# EAGLE board BradLightFlash.rev2-panou (EAGLE 6.5.0), part 1 of 2
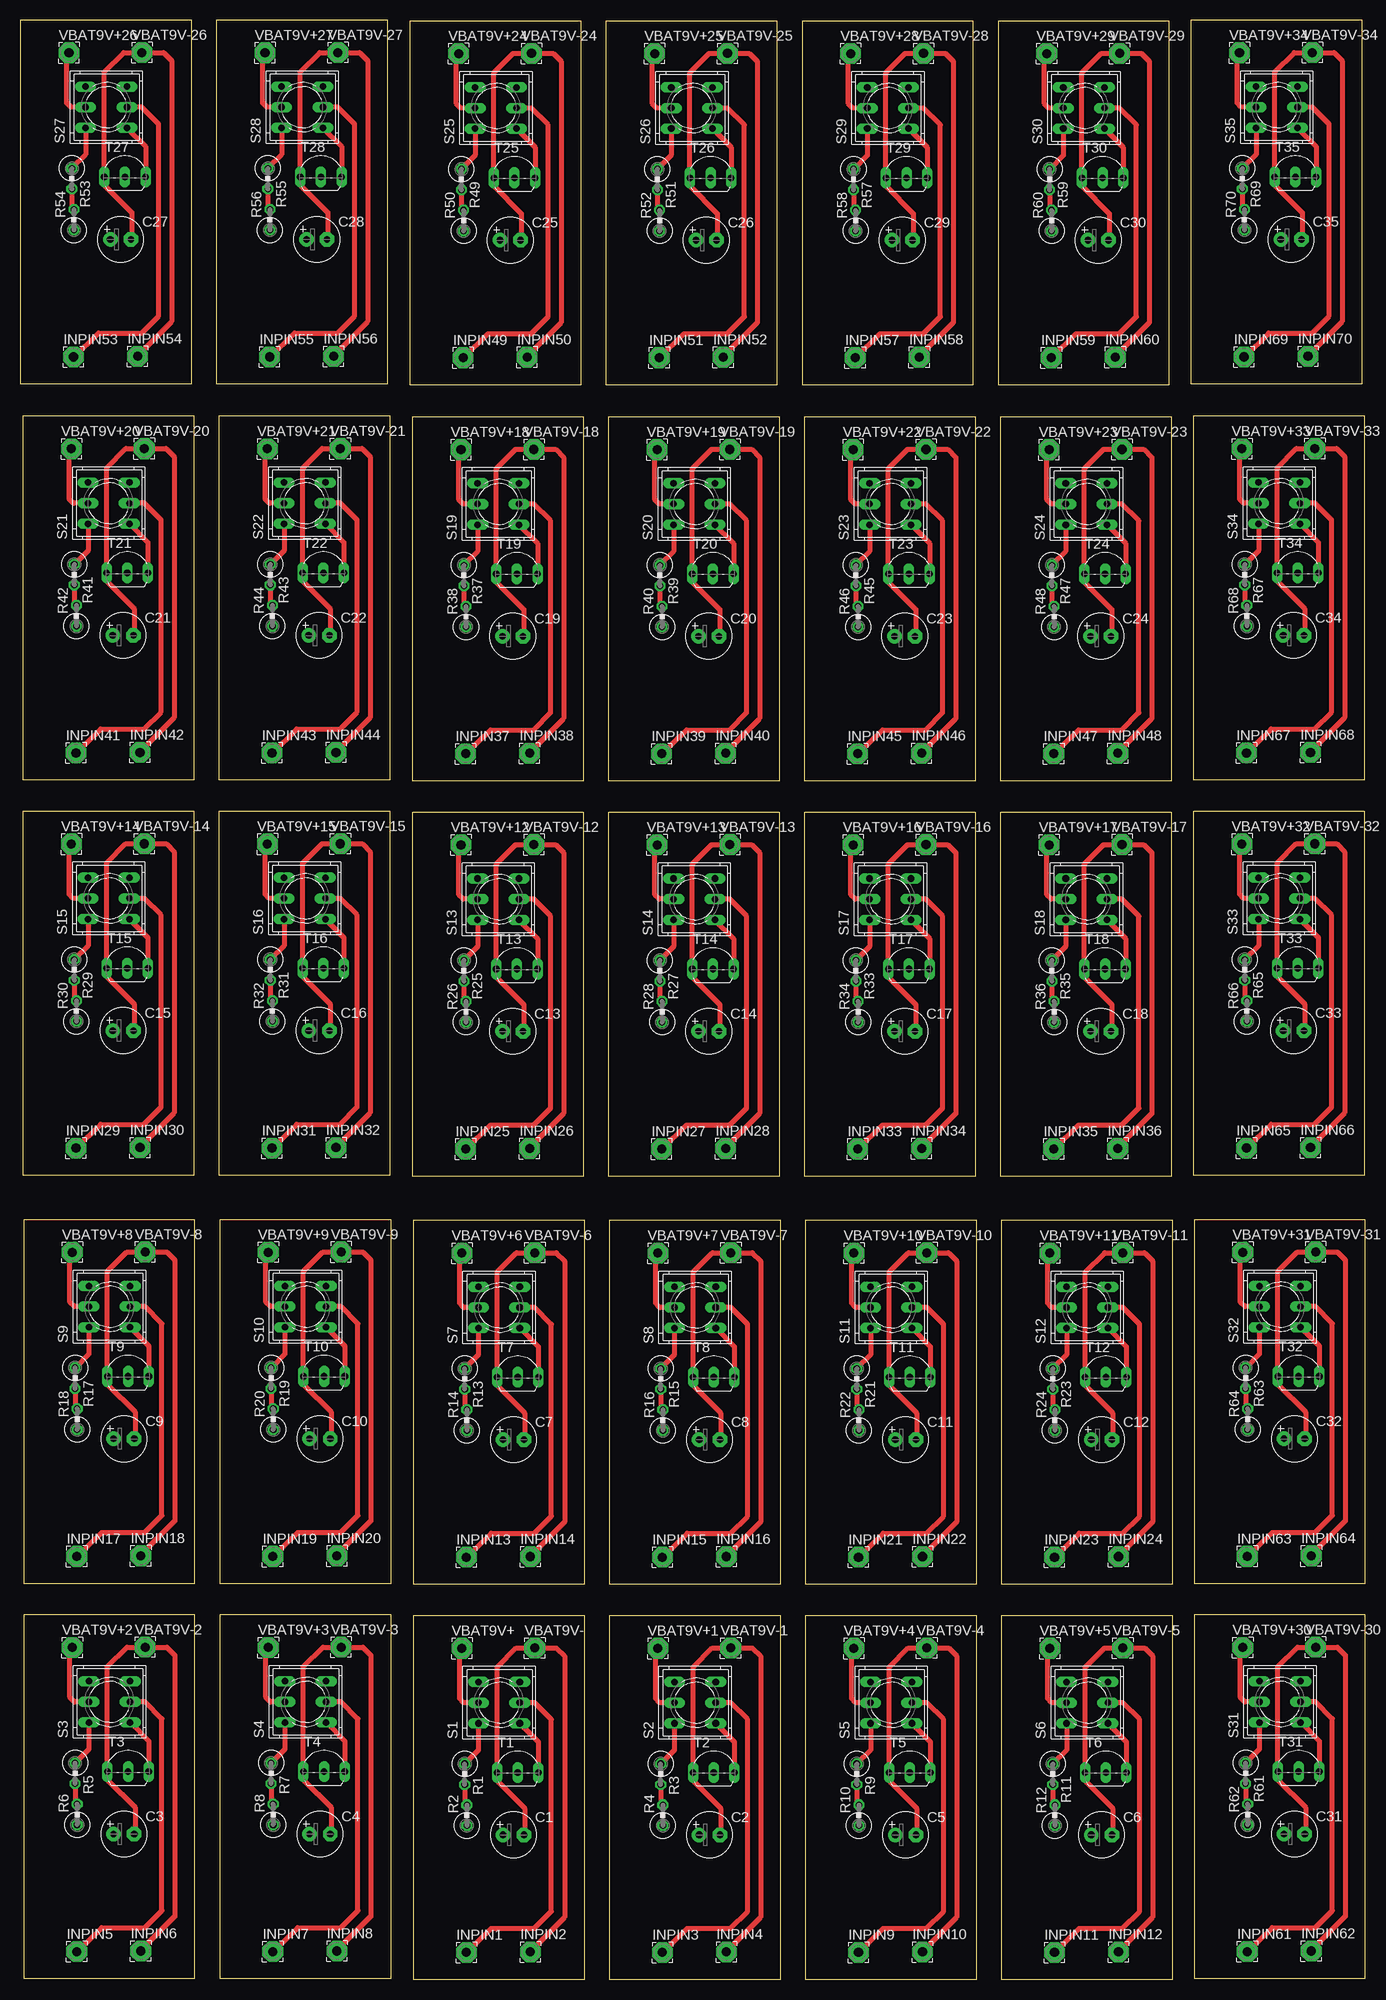
[diagram p0: board, top side]
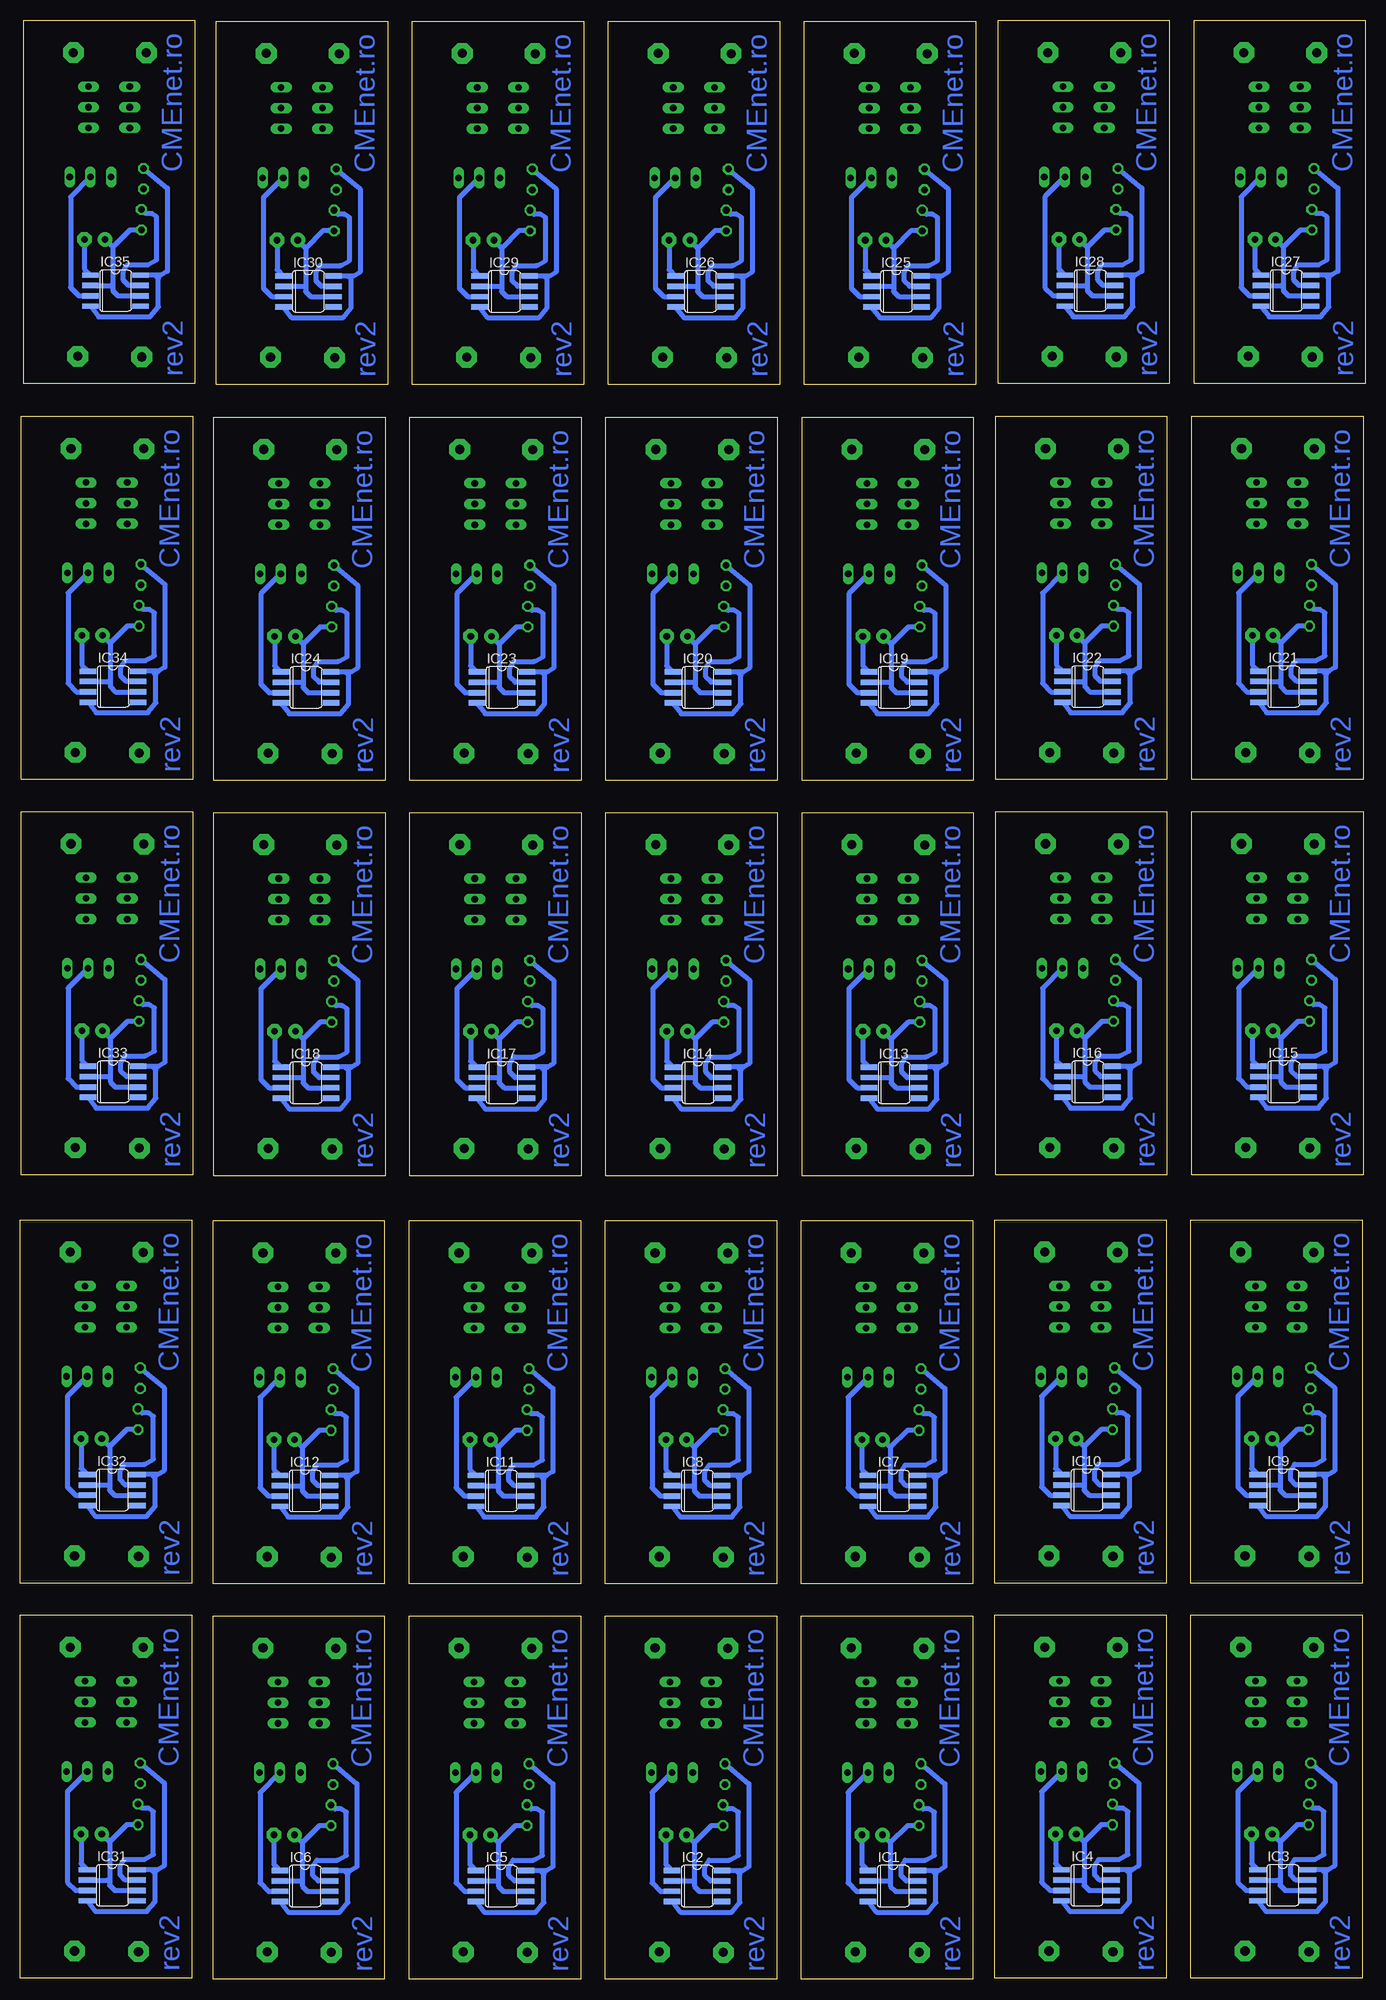
[diagram p1: board, bottom side, seen from below]

Size 165.37 x 240.88 mm. Coordinates in mm from the lower left corner, seen from the top.
Outline: 48.3,0 69.37,0 69.37,44.68 48.3,44.68 48.3,0
Outline: 72.4,0 93.47,0 93.47,44.68 72.4,44.68 72.4,0
Outline: 0.4,0.1 21.47,0.1 21.47,44.78 0.4,44.78 0.4,0.1
Outline: 24.5,0.1 45.57,0.1 45.57,44.78 24.5,44.78 24.5,0.1
Outline: 96.5,0 117.57,0 117.57,44.68 96.5,44.68 96.5,0
Outline: 120.6,0 141.67,0 141.67,44.68 120.6,44.68 120.6,0
Outline: 48.3,48.6 69.37,48.6 69.37,93.28 48.3,93.28 48.3,48.6
Outline: 72.4,48.6 93.47,48.6 93.47,93.28 72.4,93.28 72.4,48.6
Outline: 0.4,48.7 21.47,48.7 21.47,93.38 0.4,93.38 0.4,48.7
Outline: 24.5,48.7 45.57,48.7 45.57,93.38 24.5,93.38 24.5,48.7
Outline: 96.5,48.6 117.57,48.6 117.57,93.28 96.5,93.28 96.5,48.6
Outline: 120.6,48.6 141.67,48.6 141.67,93.28 120.6,93.28 120.6,48.6
Outline: 48.2,98.8 69.27,98.8 69.27,143.48 48.2,143.48 48.2,98.8
Outline: 72.3,98.8 93.37,98.8 93.37,143.48 72.3,143.48 72.3,98.8
Outline: 0.3,98.9 21.37,98.9 21.37,143.58 0.3,143.58 0.3,98.9
Outline: 24.4,98.9 45.47,98.9 45.47,143.58 24.4,143.58 24.4,98.9
Outline: 96.4,98.8 117.47,98.8 117.47,143.48 96.4,143.48 96.4,98.8
Outline: 120.5,98.8 141.57,98.8 141.57,143.48 120.5,143.48 120.5,98.8
Outline: 48.2,147.4 69.27,147.4 69.27,192.08 48.2,192.08 48.2,147.4
Outline: 72.3,147.4 93.37,147.4 93.37,192.08 72.3,192.08 72.3,147.4
Outline: 0.3,147.5 21.37,147.5 21.37,192.18 0.3,192.18 0.3,147.5
Outline: 24.4,147.5 45.47,147.5 45.47,192.18 24.4,192.18 24.4,147.5
Outline: 96.4,147.4 117.47,147.4 117.47,192.08 96.4,192.08 96.4,147.4
Outline: 120.5,147.4 141.57,147.4 141.57,192.08 120.5,192.08 120.5,147.4
Outline: 47.9,196.1 68.97,196.1 68.97,240.78 47.9,240.78 47.9,196.1
Outline: 72,196.1 93.07,196.1 93.07,240.78 72,240.78 72,196.1
Outline: 0,196.2 21.07,196.2 21.07,240.88 0,240.88 0,196.2
Outline: 24.1,196.2 45.17,196.2 45.17,240.88 24.1,240.88 24.1,196.2
Outline: 96.1,196.1 117.17,196.1 117.17,240.78 96.1,240.78 96.1,196.1
Outline: 120.2,196.1 141.27,196.1 141.27,240.78 120.2,240.78 120.2,196.1
Outline: 144.3,0.1 165.37,0.1 165.37,44.78 144.3,44.78 144.3,0.1
Outline: 144.3,48.7 165.37,48.7 165.37,93.38 144.3,93.38 144.3,48.7
Outline: 144.2,98.9 165.27,98.9 165.27,143.58 144.2,143.58 144.2,98.9
Outline: 144.2,147.5 165.27,147.5 165.27,192.18 144.2,192.18 144.2,147.5
Outline: 143.9,196.2 164.97,196.2 164.97,240.88 143.9,240.88 143.9,196.2
Copper layers (1*16): Top 0.035mm / dielectric 1.5mm / Bottom 0.035mm
Design rules "default": minimum track width 10mil, minimum drill 24mil, track to track 8mil, track to pad 8mil, pad to pad 8mil, via to via 8mil, smd to smd 8mil, copper to edge 40mil, drill to drill 8mil, minimum pad ring 10mil, minimum via ring 8mil, stop-mask expansion 4mil, vias tented up to drill 0mil, thermal gap 10mil

## Footprints (pad centres in the part's own frame; a part is rotated, then mirrored left to right if it is on the bottom)
E2,5-6 = drill 0.813 pad 1.778: + -1.27,0 | drill 0.813 pad 1.778 octagon: - 1.27,0
SO08 = smd 0.66 x 2.032: 1 -1.905,-3.073; 2 -0.635,-3.073; 3 0.635,-3.073; 4 1.905,-3.073; 5 1.905,3.073; 6 0.635,3.073; 7 -0.635,3.073; 8 -1.905,3.073
2,54/1,1 = drill 1.118 pad 2.54 octagon: 1 0,0
0309V = drill 0.813 octagon: 1 -1.27,0; 2 1.27,0
9077-2 = drill 0.813 long: 1 -2.54,2.54; 2 0,2.54; 3 2.54,2.54; 4 -2.54,-2.54; 5 0,-2.54; 6 2.54,-2.54
TO92-EBC-OVAL = drill 0.813 long: B 0,-1.27; C 2.54,-1.27; E -2.54,-1.27

## Placement (x,y rotation side)
C1  470uF  [E2,5-6]  60.63,17.75 0 top
C2  470uF  [E2,5-6]  84.73,17.75 0 top
C3  470uF  [E2,5-6]  12.73,17.85 0 top
C4  470uF  [E2,5-6]  36.83,17.85 0 top
C5  470uF  [E2,5-6]  108.83,17.75 0 top
C6  470uF  [E2,5-6]  132.93,17.75 0 top
C7  470uF  [E2,5-6]  60.63,66.35 0 top
C8  470uF  [E2,5-6]  84.73,66.35 0 top
C9  470uF  [E2,5-6]  12.73,66.45 0 top
C10  470uF  [E2,5-6]  36.83,66.45 0 top
C11  470uF  [E2,5-6]  108.83,66.35 0 top
C12  470uF  [E2,5-6]  132.93,66.35 0 top
C13  470uF  [E2,5-6]  60.53,116.55 0 top
C14  470uF  [E2,5-6]  84.63,116.55 0 top
C15  470uF  [E2,5-6]  12.63,116.65 0 top
C16  470uF  [E2,5-6]  36.73,116.65 0 top
C17  470uF  [E2,5-6]  108.73,116.55 0 top
C18  470uF  [E2,5-6]  132.83,116.55 0 top
C19  470uF  [E2,5-6]  60.53,165.15 0 top
C20  470uF  [E2,5-6]  84.63,165.15 0 top
C21  470uF  [E2,5-6]  12.63,165.25 0 top
C22  470uF  [E2,5-6]  36.73,165.25 0 top
C23  470uF  [E2,5-6]  108.73,165.15 0 top
C24  470uF  [E2,5-6]  132.83,165.15 0 top
C25  470uF  [E2,5-6]  60.23,213.85 0 top
C26  470uF  [E2,5-6]  84.33,213.85 0 top
C27  470uF  [E2,5-6]  12.33,213.95 0 top
C28  470uF  [E2,5-6]  36.43,213.95 0 top
C29  470uF  [E2,5-6]  108.43,213.85 0 top
C30  470uF  [E2,5-6]  132.53,213.85 0 top
C31  470uF  [E2,5-6]  156.63,17.85 0 top
C32  470uF  [E2,5-6]  156.63,66.45 0 top
C33  470uF  [E2,5-6]  156.53,116.65 0 top
C34  470uF  [E2,5-6]  156.53,165.25 0 top
C35  470uF  [E2,5-6]  156.23,213.95 0 top
IC1  NE555D  [SO08]  58.07,11.44 270 bottom
IC2  NE555D  [SO08]  82.17,11.44 270 bottom
IC3  NE555D  [SO08]  10.17,11.54 270 bottom
IC4  NE555D  [SO08]  34.27,11.54 270 bottom
IC5  NE555D  [SO08]  106.27,11.44 270 bottom
IC6  NE555D  [SO08]  130.37,11.44 270 bottom
IC7  NE555D  [SO08]  58.07,60.04 270 bottom
IC8  NE555D  [SO08]  82.17,60.04 270 bottom
IC9  NE555D  [SO08]  10.17,60.14 270 bottom
IC10  NE555D  [SO08]  34.27,60.14 270 bottom
IC11  NE555D  [SO08]  106.27,60.04 270 bottom
IC12  NE555D  [SO08]  130.37,60.04 270 bottom
IC13  NE555D  [SO08]  57.97,110.24 270 bottom
IC14  NE555D  [SO08]  82.07,110.24 270 bottom
IC15  NE555D  [SO08]  10.07,110.34 270 bottom
IC16  NE555D  [SO08]  34.17,110.34 270 bottom
IC17  NE555D  [SO08]  106.17,110.24 270 bottom
IC18  NE555D  [SO08]  130.27,110.24 270 bottom
IC19  NE555D  [SO08]  57.97,158.84 270 bottom
IC20  NE555D  [SO08]  82.07,158.84 270 bottom
IC21  NE555D  [SO08]  10.07,158.94 270 bottom
IC22  NE555D  [SO08]  34.17,158.94 270 bottom
IC23  NE555D  [SO08]  106.17,158.84 270 bottom
IC24  NE555D  [SO08]  130.27,158.84 270 bottom
IC25  NE555D  [SO08]  57.67,207.54 270 bottom
IC26  NE555D  [SO08]  81.77,207.54 270 bottom
IC27  NE555D  [SO08]  9.77,207.64 270 bottom
IC28  NE555D  [SO08]  33.87,207.64 270 bottom
IC29  NE555D  [SO08]  105.87,207.54 270 bottom
IC30  NE555D  [SO08]  129.97,207.54 270 bottom
IC31  NE555D  [SO08]  154.07,11.54 270 bottom
IC32  NE555D  [SO08]  154.07,60.14 270 bottom
IC33  NE555D  [SO08]  153.97,110.34 270 bottom
IC34  NE555D  [SO08]  153.97,158.94 270 bottom
IC35  NE555D  [SO08]  153.67,207.64 270 bottom
INPIN1  INPIN1  [2,54/1,1]  54.84,3.29 0 top
INPIN2  INPIN2  [2,54/1,1]  62.71,3.36 0 top
INPIN3  INPIN1  [2,54/1,1]  78.94,3.29 0 top
INPIN4  INPIN2  [2,54/1,1]  86.81,3.36 0 top
INPIN5  INPIN1  [2,54/1,1]  6.94,3.39 0 top
INPIN6  INPIN2  [2,54/1,1]  14.81,3.46 0 top
INPIN7  INPIN1  [2,54/1,1]  31.04,3.39 0 top
INPIN8  INPIN2  [2,54/1,1]  38.91,3.46 0 top
INPIN9  INPIN1  [2,54/1,1]  103.04,3.29 0 top
INPIN10  INPIN2  [2,54/1,1]  110.91,3.36 0 top
INPIN11  INPIN1  [2,54/1,1]  127.14,3.29 0 top
INPIN12  INPIN2  [2,54/1,1]  135.01,3.36 0 top
INPIN13  INPIN1  [2,54/1,1]  54.84,51.89 0 top
INPIN14  INPIN2  [2,54/1,1]  62.71,51.96 0 top
INPIN15  INPIN1  [2,54/1,1]  78.94,51.89 0 top
INPIN16  INPIN2  [2,54/1,1]  86.81,51.96 0 top
INPIN17  INPIN1  [2,54/1,1]  6.94,51.99 0 top
INPIN18  INPIN2  [2,54/1,1]  14.81,52.06 0 top
INPIN19  INPIN1  [2,54/1,1]  31.04,51.99 0 top
INPIN20  INPIN2  [2,54/1,1]  38.91,52.06 0 top
INPIN21  INPIN1  [2,54/1,1]  103.04,51.89 0 top
INPIN22  INPIN2  [2,54/1,1]  110.91,51.96 0 top
INPIN23  INPIN1  [2,54/1,1]  127.14,51.89 0 top
INPIN24  INPIN2  [2,54/1,1]  135.01,51.96 0 top
INPIN25  INPIN1  [2,54/1,1]  54.74,102.09 0 top
INPIN26  INPIN2  [2,54/1,1]  62.61,102.16 0 top
INPIN27  INPIN1  [2,54/1,1]  78.84,102.09 0 top
INPIN28  INPIN2  [2,54/1,1]  86.71,102.16 0 top
INPIN29  INPIN1  [2,54/1,1]  6.84,102.19 0 top
INPIN30  INPIN2  [2,54/1,1]  14.71,102.26 0 top
INPIN31  INPIN1  [2,54/1,1]  30.94,102.19 0 top
INPIN32  INPIN2  [2,54/1,1]  38.81,102.26 0 top
INPIN33  INPIN1  [2,54/1,1]  102.94,102.09 0 top
INPIN34  INPIN2  [2,54/1,1]  110.81,102.16 0 top
INPIN35  INPIN1  [2,54/1,1]  127.04,102.09 0 top
INPIN36  INPIN2  [2,54/1,1]  134.91,102.16 0 top
INPIN37  INPIN1  [2,54/1,1]  54.74,150.69 0 top
INPIN38  INPIN2  [2,54/1,1]  62.61,150.76 0 top
INPIN39  INPIN1  [2,54/1,1]  78.84,150.69 0 top
INPIN40  INPIN2  [2,54/1,1]  86.71,150.76 0 top
INPIN41  INPIN1  [2,54/1,1]  6.84,150.79 0 top
INPIN42  INPIN2  [2,54/1,1]  14.71,150.86 0 top
INPIN43  INPIN1  [2,54/1,1]  30.94,150.79 0 top
INPIN44  INPIN2  [2,54/1,1]  38.81,150.86 0 top
INPIN45  INPIN1  [2,54/1,1]  102.94,150.69 0 top
INPIN46  INPIN2  [2,54/1,1]  110.81,150.76 0 top
INPIN47  INPIN1  [2,54/1,1]  127.04,150.69 0 top
INPIN48  INPIN2  [2,54/1,1]  134.91,150.76 0 top
INPIN49  INPIN1  [2,54/1,1]  54.44,199.39 0 top
INPIN50  INPIN2  [2,54/1,1]  62.31,199.46 0 top
INPIN51  INPIN1  [2,54/1,1]  78.54,199.39 0 top
INPIN52  INPIN2  [2,54/1,1]  86.41,199.46 0 top
INPIN53  INPIN1  [2,54/1,1]  6.54,199.49 0 top
INPIN54  INPIN2  [2,54/1,1]  14.41,199.56 0 top
INPIN55  INPIN1  [2,54/1,1]  30.64,199.49 0 top
INPIN56  INPIN2  [2,54/1,1]  38.51,199.56 0 top
INPIN57  INPIN1  [2,54/1,1]  102.64,199.39 0 top
INPIN58  INPIN2  [2,54/1,1]  110.51,199.46 0 top
INPIN59  INPIN1  [2,54/1,1]  126.74,199.39 0 top
INPIN60  INPIN2  [2,54/1,1]  134.61,199.46 0 top
INPIN61  INPIN1  [2,54/1,1]  150.84,3.39 0 top
INPIN62  INPIN2  [2,54/1,1]  158.71,3.46 0 top
INPIN63  INPIN1  [2,54/1,1]  150.84,51.99 0 top
INPIN64  INPIN2  [2,54/1,1]  158.71,52.06 0 top
INPIN65  INPIN1  [2,54/1,1]  150.74,102.19 0 top
INPIN66  INPIN2  [2,54/1,1]  158.61,102.26 0 top
INPIN67  INPIN1  [2,54/1,1]  150.74,150.79 0 top
INPIN68  INPIN2  [2,54/1,1]  158.61,150.86 0 top
INPIN69  INPIN1  [2,54/1,1]  150.44,199.49 0 top
INPIN70  INPIN2  [2,54/1,1]  158.31,199.56 0 top
R1  1K  [0309V]  54.63,25.21 270 top
R2  1k  [0309V]  54.89,20.16 90 top
R3  1K  [0309V]  78.73,25.21 270 top
R4  1k  [0309V]  78.99,20.16 90 top
R5  1K  [0309V]  6.73,25.31 270 top
R6  1k  [0309V]  6.99,20.26 90 top
R7  1K  [0309V]  30.83,25.31 270 top
R8  1k  [0309V]  31.09,20.26 90 top
R9  1K  [0309V]  102.83,25.21 270 top
R10  1k  [0309V]  103.09,20.16 90 top
R11  1K  [0309V]  126.93,25.21 270 top
R12  1k  [0309V]  127.19,20.16 90 top
R13  1K  [0309V]  54.63,73.81 270 top
R14  1k  [0309V]  54.89,68.76 90 top
R15  1K  [0309V]  78.73,73.81 270 top
R16  1k  [0309V]  78.99,68.76 90 top
R17  1K  [0309V]  6.73,73.91 270 top
R18  1k  [0309V]  6.99,68.86 90 top
R19  1K  [0309V]  30.83,73.91 270 top
R20  1k  [0309V]  31.09,68.86 90 top
R21  1K  [0309V]  102.83,73.81 270 top
R22  1k  [0309V]  103.09,68.76 90 top
R23  1K  [0309V]  126.93,73.81 270 top
R24  1k  [0309V]  127.19,68.76 90 top
R25  1K  [0309V]  54.53,124.01 270 top
R26  1k  [0309V]  54.79,118.96 90 top
R27  1K  [0309V]  78.63,124.01 270 top
R28  1k  [0309V]  78.89,118.96 90 top
R29  1K  [0309V]  6.63,124.11 270 top
R30  1k  [0309V]  6.89,119.06 90 top
R31  1K  [0309V]  30.73,124.11 270 top
R32  1k  [0309V]  30.99,119.06 90 top
R33  1K  [0309V]  102.73,124.01 270 top
R34  1k  [0309V]  102.99,118.96 90 top
R35  1K  [0309V]  126.83,124.01 270 top
R36  1k  [0309V]  127.09,118.96 90 top
R37  1K  [0309V]  54.53,172.61 270 top
R38  1k  [0309V]  54.79,167.56 90 top
R39  1K  [0309V]  78.63,172.61 270 top
R40  1k  [0309V]  78.89,167.56 90 top
R41  1K  [0309V]  6.63,172.71 270 top
R42  1k  [0309V]  6.89,167.66 90 top
R43  1K  [0309V]  30.73,172.71 270 top
R44  1k  [0309V]  30.99,167.66 90 top
R45  1K  [0309V]  102.73,172.61 270 top
R46  1k  [0309V]  102.99,167.56 90 top
R47  1K  [0309V]  126.83,172.61 270 top
R48  1k  [0309V]  127.09,167.56 90 top
R49  1K  [0309V]  54.23,221.31 270 top
R50  1k  [0309V]  54.49,216.26 90 top
R51  1K  [0309V]  78.33,221.31 270 top
R52  1k  [0309V]  78.59,216.26 90 top
R53  1K  [0309V]  6.33,221.41 270 top
R54  1k  [0309V]  6.59,216.36 90 top
R55  1K  [0309V]  30.43,221.41 270 top
R56  1k  [0309V]  30.69,216.36 90 top
R57  1K  [0309V]  102.43,221.31 270 top
R58  1k  [0309V]  102.69,216.26 90 top
R59  1K  [0309V]  126.53,221.31 270 top
R60  1k  [0309V]  126.79,216.26 90 top
R61  1K  [0309V]  150.63,25.31 270 top
R62  1k  [0309V]  150.89,20.26 90 top
R63  1K  [0309V]  150.63,73.91 270 top
R64  1k  [0309V]  150.89,68.86 90 top
R65  1K  [0309V]  150.53,124.11 270 top
R66  1k  [0309V]  150.79,119.06 90 top
R67  1K  [0309V]  150.53,172.71 270 top
R68  1k  [0309V]  150.79,167.66 90 top
R69  1K  [0309V]  150.23,221.41 270 top
R70  1k  [0309V]  150.49,216.36 90 top
S1  9077-2  [9077-2]  58.86,34 90 top
S2  9077-2  [9077-2]  82.96,34 90 top
S3  9077-2  [9077-2]  10.96,34.1 90 top
S4  9077-2  [9077-2]  35.06,34.1 90 top
S5  9077-2  [9077-2]  107.06,34 90 top
S6  9077-2  [9077-2]  131.16,34 90 top
S7  9077-2  [9077-2]  58.86,82.6 90 top
S8  9077-2  [9077-2]  82.96,82.6 90 top
S9  9077-2  [9077-2]  10.96,82.7 90 top
S10  9077-2  [9077-2]  35.06,82.7 90 top
S11  9077-2  [9077-2]  107.06,82.6 90 top
S12  9077-2  [9077-2]  131.16,82.6 90 top
S13  9077-2  [9077-2]  58.76,132.8 90 top
S14  9077-2  [9077-2]  82.86,132.8 90 top
S15  9077-2  [9077-2]  10.86,132.9 90 top
S16  9077-2  [9077-2]  34.96,132.9 90 top
S17  9077-2  [9077-2]  106.96,132.8 90 top
S18  9077-2  [9077-2]  131.06,132.8 90 top
S19  9077-2  [9077-2]  58.76,181.4 90 top
S20  9077-2  [9077-2]  82.86,181.4 90 top
S21  9077-2  [9077-2]  10.86,181.5 90 top
S22  9077-2  [9077-2]  34.96,181.5 90 top
S23  9077-2  [9077-2]  106.96,181.4 90 top
S24  9077-2  [9077-2]  131.06,181.4 90 top
S25  9077-2  [9077-2]  58.46,230.1 90 top
S26  9077-2  [9077-2]  82.56,230.1 90 top
S27  9077-2  [9077-2]  10.56,230.2 90 top
S28  9077-2  [9077-2]  34.66,230.2 90 top
S29  9077-2  [9077-2]  106.66,230.1 90 top
S30  9077-2  [9077-2]  130.76,230.1 90 top
S31  9077-2  [9077-2]  154.86,34.1 90 top
S32  9077-2  [9077-2]  154.86,82.7 90 top
S33  9077-2  [9077-2]  154.76,132.9 90 top
S34  9077-2  [9077-2]  154.76,181.5 90 top
S35  9077-2  [9077-2]  154.46,230.2 90 top
T1  2N2222  [TO92-EBC-OVAL]  61.15,26.69 0 top
T2  2N2222  [TO92-EBC-OVAL]  85.25,26.69 0 top
T3  2N2222  [TO92-EBC-OVAL]  13.25,26.79 0 top
T4  2N2222  [TO92-EBC-OVAL]  37.35,26.79 0 top
T5  2N2222  [TO92-EBC-OVAL]  109.35,26.69 0 top
T6  2N2222  [TO92-EBC-OVAL]  133.45,26.69 0 top
T7  2N2222  [TO92-EBC-OVAL]  61.15,75.29 0 top
T8  2N2222  [TO92-EBC-OVAL]  85.25,75.29 0 top
T9  2N2222  [TO92-EBC-OVAL]  13.25,75.39 0 top
T10  2N2222  [TO92-EBC-OVAL]  37.35,75.39 0 top
T11  2N2222  [TO92-EBC-OVAL]  109.35,75.29 0 top
T12  2N2222  [TO92-EBC-OVAL]  133.45,75.29 0 top
T13  2N2222  [TO92-EBC-OVAL]  61.05,125.49 0 top
T14  2N2222  [TO92-EBC-OVAL]  85.15,125.49 0 top
T15  2N2222  [TO92-EBC-OVAL]  13.15,125.59 0 top
T16  2N2222  [TO92-EBC-OVAL]  37.25,125.59 0 top
T17  2N2222  [TO92-EBC-OVAL]  109.25,125.49 0 top
T18  2N2222  [TO92-EBC-OVAL]  133.35,125.49 0 top
T19  2N2222  [TO92-EBC-OVAL]  61.05,174.09 0 top
T20  2N2222  [TO92-EBC-OVAL]  85.15,174.09 0 top
T21  2N2222  [TO92-EBC-OVAL]  13.15,174.19 0 top
T22  2N2222  [TO92-EBC-OVAL]  37.25,174.19 0 top
T23  2N2222  [TO92-EBC-OVAL]  109.25,174.09 0 top
T24  2N2222  [TO92-EBC-OVAL]  133.35,174.09 0 top
T25  2N2222  [TO92-EBC-OVAL]  60.75,222.79 0 top
T26  2N2222  [TO92-EBC-OVAL]  84.85,222.79 0 top
T27  2N2222  [TO92-EBC-OVAL]  12.85,222.89 0 top
T28  2N2222  [TO92-EBC-OVAL]  36.95,222.89 0 top
T29  2N2222  [TO92-EBC-OVAL]  108.95,222.79 0 top
T30  2N2222  [TO92-EBC-OVAL]  133.05,222.79 0 top
T31  2N2222  [TO92-EBC-OVAL]  157.15,26.79 0 top
T32  2N2222  [TO92-EBC-OVAL]  157.15,75.39 0 top
T33  2N2222  [TO92-EBC-OVAL]  157.05,125.59 0 top
T34  2N2222  [TO92-EBC-OVAL]  157.05,174.19 0 top
T35  2N2222  [TO92-EBC-OVAL]  156.75,222.89 0 top
VBAT9V+  VBAT9v+  [2,54/1,1]  54.28,40.69 0 top
VBAT9V+1  VBAT9v+  [2,54/1,1]  78.38,40.69 0 top
VBAT9V+2  VBAT9v+  [2,54/1,1]  6.38,40.79 0 top
VBAT9V+3  VBAT9v+  [2,54/1,1]  30.48,40.79 0 top
VBAT9V+4  VBAT9v+  [2,54/1,1]  102.48,40.69 0 top
VBAT9V+5  VBAT9v+  [2,54/1,1]  126.58,40.69 0 top
VBAT9V+6  VBAT9v+  [2,54/1,1]  54.28,89.29 0 top
VBAT9V+7  VBAT9v+  [2,54/1,1]  78.38,89.29 0 top
VBAT9V+8  VBAT9v+  [2,54/1,1]  6.38,89.39 0 top
VBAT9V+9  VBAT9v+  [2,54/1,1]  30.48,89.39 0 top
VBAT9V+10  VBAT9v+  [2,54/1,1]  102.48,89.29 0 top
VBAT9V+11  VBAT9v+  [2,54/1,1]  126.58,89.29 0 top
VBAT9V+12  VBAT9v+  [2,54/1,1]  54.18,139.49 0 top
VBAT9V+13  VBAT9v+  [2,54/1,1]  78.28,139.49 0 top
VBAT9V+14  VBAT9v+  [2,54/1,1]  6.28,139.59 0 top
VBAT9V+15  VBAT9v+  [2,54/1,1]  30.38,139.59 0 top
VBAT9V+16  VBAT9v+  [2,54/1,1]  102.38,139.49 0 top
VBAT9V+17  VBAT9v+  [2,54/1,1]  126.48,139.49 0 top
VBAT9V+18  VBAT9v+  [2,54/1,1]  54.18,188.09 0 top
VBAT9V+19  VBAT9v+  [2,54/1,1]  78.28,188.09 0 top
VBAT9V+20  VBAT9v+  [2,54/1,1]  6.28,188.19 0 top
VBAT9V+21  VBAT9v+  [2,54/1,1]  30.38,188.19 0 top
VBAT9V+22  VBAT9v+  [2,54/1,1]  102.38,188.09 0 top
VBAT9V+23  VBAT9v+  [2,54/1,1]  126.48,188.09 0 top
VBAT9V+24  VBAT9v+  [2,54/1,1]  53.88,236.79 0 top
VBAT9V+25  VBAT9v+  [2,54/1,1]  77.98,236.79 0 top
VBAT9V+26  VBAT9v+  [2,54/1,1]  5.98,236.89 0 top
VBAT9V+27  VBAT9v+  [2,54/1,1]  30.08,236.89 0 top
VBAT9V+28  VBAT9v+  [2,54/1,1]  102.08,236.79 0 top
VBAT9V+29  VBAT9v+  [2,54/1,1]  126.18,236.79 0 top
VBAT9V+30  VBAT9v+  [2,54/1,1]  150.28,40.79 0 top
VBAT9V+31  VBAT9v+  [2,54/1,1]  150.28,89.39 0 top
VBAT9V+32  VBAT9v+  [2,54/1,1]  150.18,139.59 0 top
VBAT9V+33  VBAT9v+  [2,54/1,1]  150.18,188.19 0 top
VBAT9V+34  VBAT9v+  [2,54/1,1]  149.88,236.89 0 top
VBAT9V-  VBAT9v-  [2,54/1,1]  63.24,40.72 0 top
VBAT9V-1  VBAT9v-  [2,54/1,1]  87.34,40.72 0 top
VBAT9V-2  VBAT9v-  [2,54/1,1]  15.34,40.82 0 top
VBAT9V-3  VBAT9v-  [2,54/1,1]  39.44,40.82 0 top
VBAT9V-4  VBAT9v-  [2,54/1,1]  111.44,40.72 0 top
VBAT9V-5  VBAT9v-  [2,54/1,1]  135.54,40.72 0 top
VBAT9V-6  VBAT9v-  [2,54/1,1]  63.24,89.32 0 top
VBAT9V-7  VBAT9v-  [2,54/1,1]  87.34,89.32 0 top
VBAT9V-8  VBAT9v-  [2,54/1,1]  15.34,89.42 0 top
VBAT9V-9  VBAT9v-  [2,54/1,1]  39.44,89.42 0 top
VBAT9V-10  VBAT9v-  [2,54/1,1]  111.44,89.32 0 top
VBAT9V-11  VBAT9v-  [2,54/1,1]  135.54,89.32 0 top
VBAT9V-12  VBAT9v-  [2,54/1,1]  63.14,139.52 0 top
VBAT9V-13  VBAT9v-  [2,54/1,1]  87.24,139.52 0 top
VBAT9V-14  VBAT9v-  [2,54/1,1]  15.24,139.62 0 top
VBAT9V-15  VBAT9v-  [2,54/1,1]  39.34,139.62 0 top
VBAT9V-16  VBAT9v-  [2,54/1,1]  111.34,139.52 0 top
VBAT9V-17  VBAT9v-  [2,54/1,1]  135.44,139.52 0 top
VBAT9V-18  VBAT9v-  [2,54/1,1]  63.14,188.12 0 top
VBAT9V-19  VBAT9v-  [2,54/1,1]  87.24,188.12 0 top
VBAT9V-20  VBAT9v-  [2,54/1,1]  15.24,188.22 0 top
VBAT9V-21  VBAT9v-  [2,54/1,1]  39.34,188.22 0 top
VBAT9V-22  VBAT9v-  [2,54/1,1]  111.34,188.12 0 top
VBAT9V-23  VBAT9v-  [2,54/1,1]  135.44,188.12 0 top
VBAT9V-24  VBAT9v-  [2,54/1,1]  62.84,236.82 0 top
VBAT9V-25  VBAT9v-  [2,54/1,1]  86.94,236.82 0 top
VBAT9V-26  VBAT9v-  [2,54/1,1]  14.94,236.92 0 top
VBAT9V-27  VBAT9v-  [2,54/1,1]  39.04,236.92 0 top
VBAT9V-28  VBAT9v-  [2,54/1,1]  111.04,236.82 0 top
VBAT9V-29  VBAT9v-  [2,54/1,1]  135.14,236.82 0 top
VBAT9V-30  VBAT9v-  [2,54/1,1]  159.24,40.82 0 top
VBAT9V-31  VBAT9v-  [2,54/1,1]  159.24,89.42 0 top
VBAT9V-32  VBAT9v-  [2,54/1,1]  159.14,139.62 0 top
VBAT9V-33  VBAT9v-  [2,54/1,1]  159.14,188.22 0 top
VBAT9V-34  VBAT9v-  [2,54/1,1]  158.84,236.92 0 top

## Library data of the parts
C1-C35 IC1-IC35 R1-R70 T1-T35 = adafruit
INPIN1-INPIN70 VBAT9V+ VBAT9V+1-VBAT9V+34 VBAT9V- VBAT9V-1-VBAT9V-34 = wirepad
S1-S35 = switch-misc

## Nets
N$1: S1.2 VBAT9V+.1
N$2: IC1.4 IC1.8 R1.1 S1.1
N$3: C1.- IC1.1 INPIN2.1 T1.E VBAT9V-.1
N$4: C1.+ IC1.2 IC1.6 R2.1
N$5: S2.2 VBAT9V+1.1
N$6: IC1.7 R1.2 R2.2
N$7: IC1.3 T1.B
N$8: S1.4 T1.C
N$9: IC2.4 IC2.8 R3.1 S2.1
N$10: INPIN1.1 S1.5
N$11: C2.- IC2.1 INPIN4.1 T2.E VBAT9V-1.1
N$12: C2.+ IC2.2 IC2.6 R4.1
N$13: IC2.7 R3.2 R4.2
N$14: IC2.3 T2.B
N$15: S2.4 T2.C
N$16: INPIN3.1 S2.5
N$17: S3.2 VBAT9V+2.1
N$18: IC3.4 IC3.8 R5.1 S3.1
N$19: C3.- IC3.1 INPIN6.1 T3.E VBAT9V-2.1
N$20: C3.+ IC3.2 IC3.6 R6.1
N$21: IC3.7 R5.2 R6.2
N$22: IC3.3 T3.B
N$23: S3.4 T3.C
N$24: INPIN5.1 S3.5
N$25: S4.2 VBAT9V+3.1
N$26: IC4.4 IC4.8 R7.1 S4.1
N$27: C4.- IC4.1 INPIN8.1 T4.E VBAT9V-3.1
N$28: C4.+ IC4.2 IC4.6 R8.1
N$29: IC4.7 R7.2 R8.2
N$30: IC4.3 T4.B
N$31: S4.4 T4.C
N$32: INPIN7.1 S4.5
N$33: S5.2 VBAT9V+4.1
N$34: IC5.4 IC5.8 R9.1 S5.1
N$35: C5.- IC5.1 INPIN10.1 T5.E VBAT9V-4.1
N$36: C5.+ IC5.2 IC5.6 R10.1
N$37: IC5.7 R9.2 R10.2
N$38: IC5.3 T5.B
N$39: S5.4 T5.C
N$40: INPIN9.1 S5.5
N$41: S6.2 VBAT9V+5.1
N$42: IC6.4 IC6.8 R11.1 S6.1
N$43: C6.- IC6.1 INPIN12.1 T6.E VBAT9V-5.1
N$44: C6.+ IC6.2 IC6.6 R12.1
N$45: IC6.7 R11.2 R12.2
N$46: IC6.3 T6.B
N$47: S6.4 T6.C
N$48: INPIN11.1 S6.5
N$49: S7.2 VBAT9V+6.1
N$50: IC7.4 IC7.8 R13.1 S7.1
N$51: C7.- IC7.1 INPIN14.1 T7.E VBAT9V-6.1
N$52: C7.+ IC7.2 IC7.6 R14.1
N$53: IC7.7 R13.2 R14.2
N$54: IC7.3 T7.B
N$55: S7.4 T7.C
N$56: INPIN13.1 S7.5
N$57: S8.2 VBAT9V+7.1
N$58: IC8.4 IC8.8 R15.1 S8.1
N$59: C8.- IC8.1 INPIN16.1 T8.E VBAT9V-7.1
N$60: C8.+ IC8.2 IC8.6 R16.1
N$61: IC8.7 R15.2 R16.2
N$62: IC8.3 T8.B
N$63: S8.4 T8.C
N$64: INPIN15.1 S8.5
N$65: S9.2 VBAT9V+8.1
N$66: IC9.4 IC9.8 R17.1 S9.1
N$67: C9.- IC9.1 INPIN18.1 T9.E VBAT9V-8.1
N$68: C9.+ IC9.2 IC9.6 R18.1
N$69: IC9.7 R17.2 R18.2
N$70: IC9.3 T9.B
N$71: S9.4 T9.C
N$72: INPIN17.1 S9.5
N$73: S10.2 VBAT9V+9.1
N$74: IC10.4 IC10.8 R19.1 S10.1
N$75: C10.- IC10.1 INPIN20.1 T10.E VBAT9V-9.1
N$76: C10.+ IC10.2 IC10.6 R20.1
N$77: IC10.7 R19.2 R20.2
N$78: IC10.3 T10.B
N$79: S10.4 T10.C
N$80: INPIN19.1 S10.5
N$81: S11.2 VBAT9V+10.1
N$82: IC11.4 IC11.8 R21.1 S11.1
N$83: C11.- IC11.1 INPIN22.1 T11.E VBAT9V-10.1
N$84: C11.+ IC11.2 IC11.6 R22.1
N$85: IC11.7 R21.2 R22.2
N$86: IC11.3 T11.B
N$87: S11.4 T11.C
N$88: INPIN21.1 S11.5
N$89: S12.2 VBAT9V+11.1
N$90: IC12.4 IC12.8 R23.1 S12.1
N$91: C12.- IC12.1 INPIN24.1 T12.E VBAT9V-11.1
N$92: C12.+ IC12.2 IC12.6 R24.1
N$93: IC12.7 R23.2 R24.2
N$94: IC12.3 T12.B
N$95: S12.4 T12.C
N$96: INPIN23.1 S12.5
N$97: S13.2 VBAT9V+12.1
N$98: IC13.4 IC13.8 R25.1 S13.1
N$99: C13.- IC13.1 INPIN26.1 T13.E VBAT9V-12.1
N$100: C13.+ IC13.2 IC13.6 R26.1
N$101: IC13.7 R25.2 R26.2
N$102: IC13.3 T13.B
N$103: S13.4 T13.C
N$104: INPIN25.1 S13.5
N$105: S14.2 VBAT9V+13.1
N$106: IC14.4 IC14.8 R27.1 S14.1
N$107: C14.- IC14.1 INPIN28.1 T14.E VBAT9V-13.1
N$108: C14.+ IC14.2 IC14.6 R28.1
N$109: IC14.7 R27.2 R28.2
N$110: IC14.3 T14.B
N$111: S14.4 T14.C
N$112: INPIN27.1 S14.5
N$113: S15.2 VBAT9V+14.1
N$114: IC15.4 IC15.8 R29.1 S15.1
N$115: C15.- IC15.1 INPIN30.1 T15.E VBAT9V-14.1
N$116: C15.+ IC15.2 IC15.6 R30.1
N$117: IC15.7 R29.2 R30.2
N$118: IC15.3 T15.B
N$119: S15.4 T15.C
N$120: INPIN29.1 S15.5
N$121: S16.2 VBAT9V+15.1
N$122: IC16.4 IC16.8 R31.1 S16.1
N$123: C16.- IC16.1 INPIN32.1 T16.E VBAT9V-15.1
N$124: C16.+ IC16.2 IC16.6 R32.1
N$125: IC16.7 R31.2 R32.2
N$126: IC16.3 T16.B
N$127: S16.4 T16.C
N$128: INPIN31.1 S16.5
N$129: S17.2 VBAT9V+16.1
N$130: IC17.4 IC17.8 R33.1 S17.1
N$131: C17.- IC17.1 INPIN34.1 T17.E VBAT9V-16.1
N$132: C17.+ IC17.2 IC17.6 R34.1
N$133: IC17.7 R33.2 R34.2
N$134: IC17.3 T17.B
N$135: S17.4 T17.C
N$136: INPIN33.1 S17.5
N$137: S18.2 VBAT9V+17.1
N$138: IC18.4 IC18.8 R35.1 S18.1
N$139: C18.- IC18.1 INPIN36.1 T18.E VBAT9V-17.1
N$140: C18.+ IC18.2 IC18.6 R36.1
N$141: IC18.7 R35.2 R36.2
N$142: IC18.3 T18.B
N$143: S18.4 T18.C
N$144: INPIN35.1 S18.5
N$145: S19.2 VBAT9V+18.1
N$146: IC19.4 IC19.8 R37.1 S19.1
N$147: C19.- IC19.1 INPIN38.1 T19.E VBAT9V-18.1
N$148: C19.+ IC19.2 IC19.6 R38.1
N$149: IC19.7 R37.2 R38.2
N$150: IC19.3 T19.B
N$151: S19.4 T19.C
N$152: INPIN37.1 S19.5
N$153: S20.2 VBAT9V+19.1
N$154: IC20.4 IC20.8 R39.1 S20.1
N$155: C20.- IC20.1 INPIN40.1 T20.E VBAT9V-19.1
N$156: C20.+ IC20.2 IC20.6 R40.1
N$157: IC20.7 R39.2 R40.2
N$158: IC20.3 T20.B
N$159: S20.4 T20.C
N$160: INPIN39.1 S20.5
N$161: S21.2 VBAT9V+20.1
N$162: IC21.4 IC21.8 R41.1 S21.1
N$163: C21.- IC21.1 INPIN42.1 T21.E VBAT9V-20.1
N$164: C21.+ IC21.2 IC21.6 R42.1
N$165: IC21.7 R41.2 R42.2
N$166: IC21.3 T21.B
N$167: S21.4 T21.C
N$168: INPIN41.1 S21.5
N$169: S22.2 VBAT9V+21.1
N$170: IC22.4 IC22.8 R43.1 S22.1
N$171: C22.- IC22.1 INPIN44.1 T22.E VBAT9V-21.1
N$172: C22.+ IC22.2 IC22.6 R44.1
N$173: IC22.7 R43.2 R44.2
N$174: IC22.3 T22.B
N$175: S22.4 T22.C
N$176: INPIN43.1 S22.5
N$177: S23.2 VBAT9V+22.1
N$178: IC23.4 IC23.8 R45.1 S23.1
N$179: C23.- IC23.1 INPIN46.1 T23.E VBAT9V-22.1
N$180: C23.+ IC23.2 IC23.6 R46.1
N$181: IC23.7 R45.2 R46.2
N$182: IC23.3 T23.B
N$183: S23.4 T23.C
N$184: INPIN45.1 S23.5
N$185: S24.2 VBAT9V+23.1
N$186: IC24.4 IC24.8 R47.1 S24.1
N$187: C24.- IC24.1 INPIN48.1 T24.E VBAT9V-23.1
N$188: C24.+ IC24.2 IC24.6 R48.1
N$189: IC24.7 R47.2 R48.2
N$190: IC24.3 T24.B
N$191: S24.4 T24.C
N$192: INPIN47.1 S24.5
N$193: S25.2 VBAT9V+24.1
N$194: IC25.4 IC25.8 R49.1 S25.1
N$195: C25.- IC25.1 INPIN50.1 T25.E VBAT9V-24.1
N$196: C25.+ IC25.2 IC25.6 R50.1
N$197: IC25.7 R49.2 R50.2
N$198: IC25.3 T25.B
N$199: S25.4 T25.C
N$200: INPIN49.1 S25.5
N$201: S26.2 VBAT9V+25.1
N$202: IC26.4 IC26.8 R51.1 S26.1
N$203: C26.- IC26.1 INPIN52.1 T26.E VBAT9V-25.1
N$204: C26.+ IC26.2 IC26.6 R52.1
N$205: IC26.7 R51.2 R52.2
N$206: IC26.3 T26.B
N$207: S26.4 T26.C
N$208: INPIN51.1 S26.5
N$209: S27.2 VBAT9V+26.1
N$210: IC27.4 IC27.8 R53.1 S27.1
N$211: C27.- IC27.1 INPIN54.1 T27.E VBAT9V-26.1
N$212: C27.+ IC27.2 IC27.6 R54.1
N$213: IC27.7 R53.2 R54.2
N$214: IC27.3 T27.B
N$215: S27.4 T27.C
N$216: INPIN53.1 S27.5
N$217: S28.2 VBAT9V+27.1
N$218: IC28.4 IC28.8 R55.1 S28.1
N$219: C28.- IC28.1 INPIN56.1 T28.E VBAT9V-27.1
N$220: C28.+ IC28.2 IC28.6 R56.1
N$221: IC28.7 R55.2 R56.2
N$222: IC28.3 T28.B
N$223: S28.4 T28.C
N$224: INPIN55.1 S28.5
N$225: S29.2 VBAT9V+28.1
N$226: IC29.4 IC29.8 R57.1 S29.1
N$227: C29.- IC29.1 INPIN58.1 T29.E VBAT9V-28.1
N$228: C29.+ IC29.2 IC29.6 R58.1
N$229: IC29.7 R57.2 R58.2
N$230: IC29.3 T29.B
N$231: S29.4 T29.C
N$232: INPIN57.1 S29.5
N$233: S30.2 VBAT9V+29.1
N$234: IC30.4 IC30.8 R59.1 S30.1
N$235: C30.- IC30.1 INPIN60.1 T30.E VBAT9V-29.1
N$236: C30.+ IC30.2 IC30.6 R60.1
N$237: IC30.7 R59.2 R60.2
N$238: IC30.3 T30.B
N$239: S30.4 T30.C
N$240: INPIN59.1 S30.5
N$241: S31.2 VBAT9V+30.1
N$242: IC31.4 IC31.8 R61.1 S31.1
N$243: C31.- IC31.1 INPIN62.1 T31.E VBAT9V-30.1
N$244: C31.+ IC31.2 IC31.6 R62.1
N$245: IC31.7 R61.2 R62.2
N$246: IC31.3 T31.B
N$247: S31.4 T31.C
N$248: INPIN61.1 S31.5
N$249: S32.2 VBAT9V+31.1
N$250: IC32.4 IC32.8 R63.1 S32.1
N$251: C32.- IC32.1 INPIN64.1 T32.E VBAT9V-31.1
N$252: C32.+ IC32.2 IC32.6 R64.1
N$253: IC32.7 R63.2 R64.2
N$254: IC32.3 T32.B
N$255: S32.4 T32.C
N$256: INPIN63.1 S32.5
N$257: S33.2 VBAT9V+32.1
N$258: IC33.4 IC33.8 R65.1 S33.1
N$259: C33.- IC33.1 INPIN66.1 T33.E VBAT9V-32.1
N$260: C33.+ IC33.2 IC33.6 R66.1
N$261: IC33.7 R65.2 R66.2
N$262: IC33.3 T33.B
N$263: S33.4 T33.C
N$264: INPIN65.1 S33.5
N$265: S34.2 VBAT9V+33.1
N$266: IC34.4 IC34.8 R67.1 S34.1
N$267: C34.- IC34.1 INPIN68.1 T34.E VBAT9V-33.1
N$268: C34.+ IC34.2 IC34.6 R68.1
N$269: IC34.7 R67.2 R68.2
N$270: IC34.3 T34.B
N$271: S34.4 T34.C
N$272: INPIN67.1 S34.5
N$273: S35.2 VBAT9V+34.1
N$274: IC35.4 IC35.8 R69.1 S35.1
N$275: C35.- IC35.1 INPIN70.1 T35.E VBAT9V-34.1
N$276: C35.+ IC35.2 IC35.6 R70.1
N$277: IC35.7 R69.2 R70.2
N$278: IC35.3 T35.B
N$279: S35.4 T35.C
N$280: INPIN69.1 S35.5